# EAGLE board 2led (EAGLE 6.4)
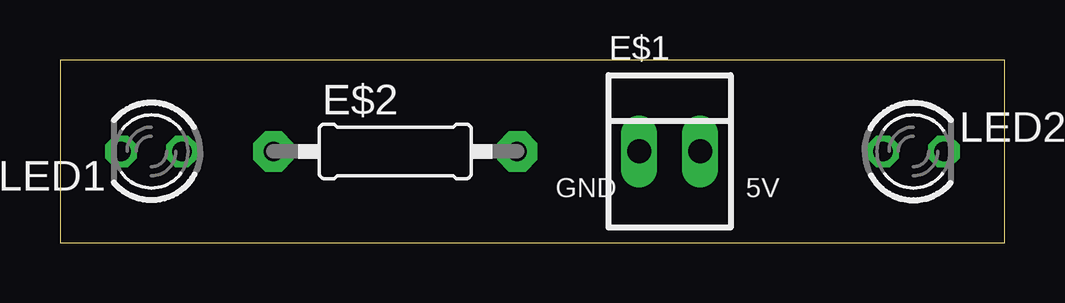
[diagram p0: board, top side]
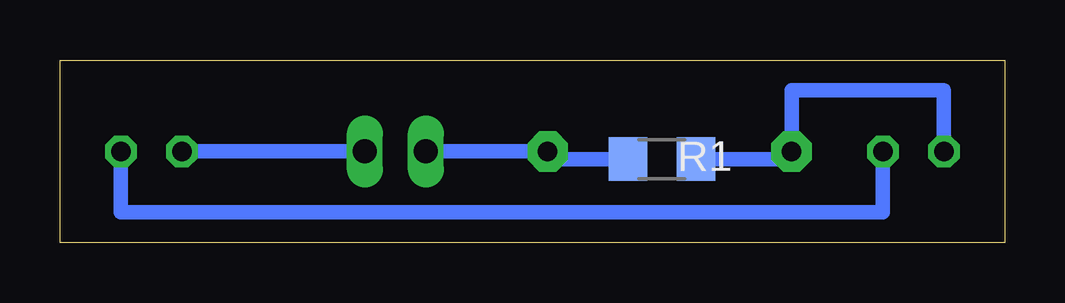
[diagram p1: board, bottom side, seen from below]

Size 39.37 x 7.62 mm. Coordinates in mm from the lower left corner, seen from the top.
Copper layers (1*16): Top 0.035mm / dielectric 1.5mm / Bottom 0.035mm
Design rules "default": minimum track width 10mil, minimum drill 24mil, track to track 8mil, track to pad 8mil, pad to pad 8mil, via to via 8mil, smd to smd 8mil, copper to edge 40mil, drill to drill 8mil, minimum pad ring 10mil, minimum via ring 8mil, stop-mask expansion 4mil, vias tented up to drill 0mil, thermal gap 10mil
Net classes: 0 default: width 0.457 mm; 1 power: width 0.914 mm

## Footprints (pad centres in the part's own frame; a part is rotated, then mirrored left to right if it is on the bottom)
22-23-2021 = drill 1 long: 1 -1.27,0; 2 1.27,0
0207/10 = drill 0.813 pad 1.676 octagon: 1 -5.08,0; 2 5.08,0
LED3MM = drill 0.813 octagon: A -1.27,0; K 1.27,0
R1206 = smd 1.6 x 1.803: 1 -1.422,0; 2 1.422,0

## Placement (x,y rotation side)
E$1  [22-23-2021]  25.4,3.81 0 top
E$2  [0207/10]  13.97,3.81 0 top
LED1  [LED3MM]  3.81,3.81 180 top
LED2  [LED3MM]  35.56,3.81 0 top
R1  1K  [R1206]  14.29,3.49 0 bottom

## Library data of the parts
E$1 = con-molex
E$2 = adafruit
LED1 LED2 = led
R1 = smd-ipc

## Nets
S$1 [power]: E$1.1 E$2.2 R1.1
S$3: LED1.A LED2.K
S$4: E$2.1 LED1.K R1.2
S$5 [power]: E$1.2 LED2.A

## Tracks (layer width: path | path; a pad name or v marks a point on that pad's centre or on a via)
S$1
  Bottom 0.61: E$1.1 E$2.2 19.05,3.49 R1.1
S$3
  Bottom 0.61: LED1.A 5.08,1.27 36.83,1.27 LED2.K
S$4
  Bottom 0.61: LED1.K 2.54,6.35 8.89,6.35 E$2.1 8.89,3.49 R1.2
S$5
  Bottom 0.61: LED2.A E$1.2

## Text on the board
tPlace: GND | 5V